# EAGLE board os30_master (EAGLE 7.7.0)
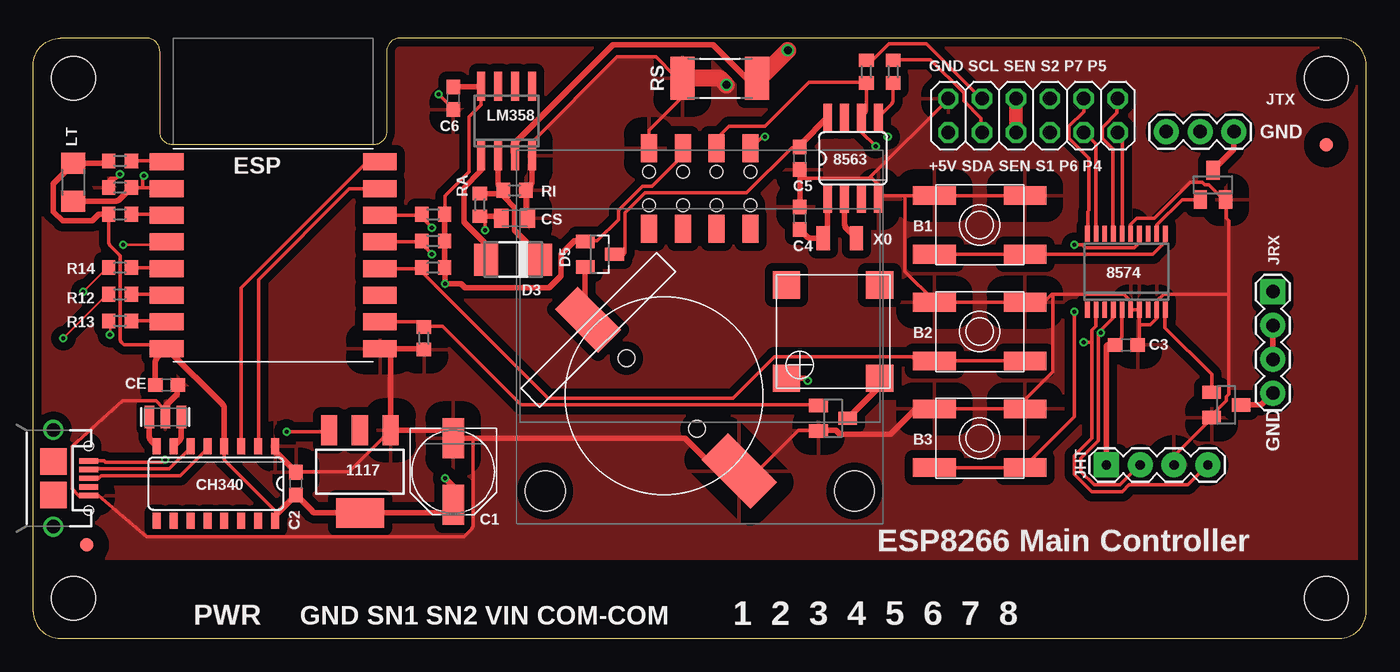
[diagram p0: board, top side]
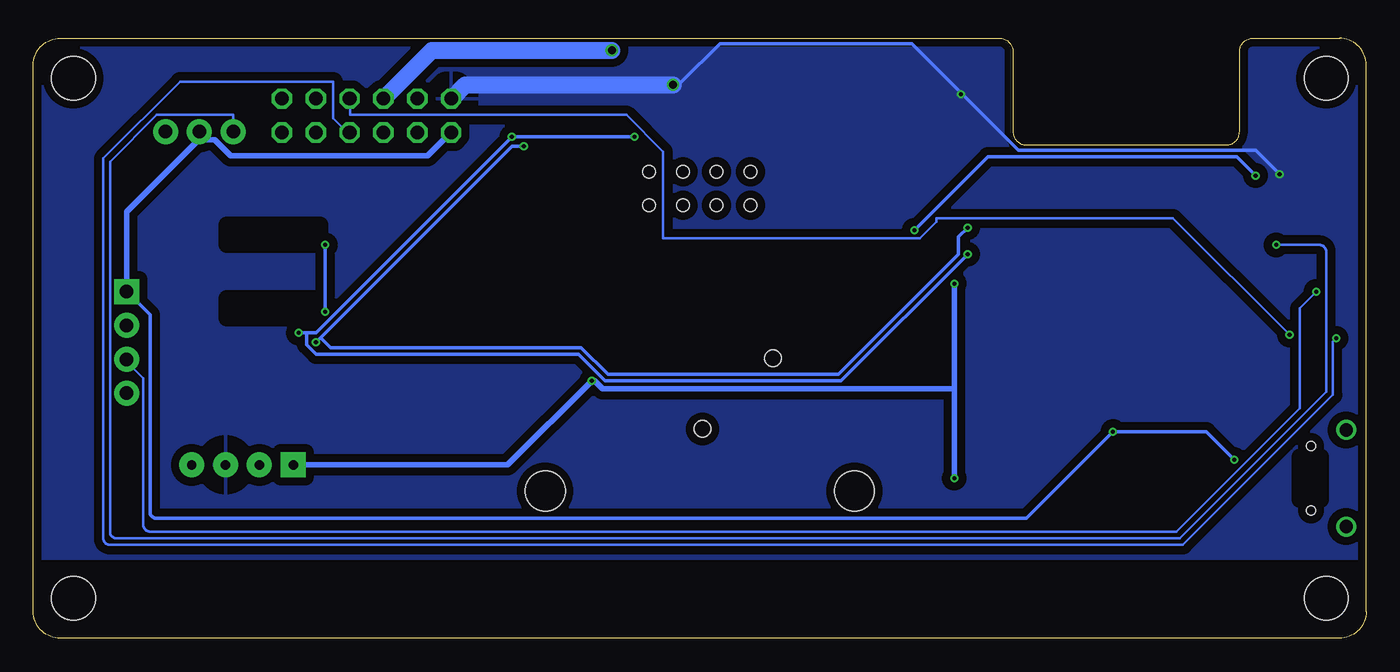
[diagram p1: board, bottom side, seen from below]

Size 100 x 45 mm. Coordinates in mm from the lower left corner, seen from the top.
Outline: 2,0 98,0 arc90 100,2 100,43 arc90 98,45 27.5,45 arc90 26.5,44 26.5,38 arc-90 25.5,37 10.5,37 arc-90 9.5,38 9.5,44 arc90 8.5,45 2,45 arc90 0,43 0,2 arc90 2,0
Copper layers (1*16): Top 0.035mm / dielectric 1.5mm / Bottom 0.035mm
Design rules "Fusion_eagle_rule_v1.1 *": minimum track width 6mil, minimum drill 12mil, track to track 6mil, track to pad 6mil, pad to pad 6mil, via to via 6mil, smd to smd 0mil, copper to edge 10mil, drill to drill 10mil, minimum pad ring 10mil, minimum via ring 6mil, stop-mask expansion 2mil, vias tented up to drill 100mil, thermal gap 50mil
Net classes: 0 default: width 0.203 mm, clearance 0.178 mm; 1 power: width 0.254 mm, clearance 0.203 mm; 2 relaypower: width 0.813 mm, clearance 0.305 mm
Holes 3.3 mm at 3,3 97,3 3,42 97,42
bRestrict: area 78.5,29.5 to 85.5,31; area 78.5,24 to 85.5,25.5; area 3.4,10.4 to 5,13.6
vRestrict: area 11,20.5 to 25,36.5

## Footprints (pad centres in the part's own frame; a part is rotated, then mirrored left to right if it is on the bottom)
SOT223 = smd 1.219 x 2.235: 1 -2.311,-3.099; 2 0,-3.099; 3 2.311,-3.099 | smd 3.6 x 2.2: 4 0,3.099
SO08 = smd 0.66 x 2.032: 1 -1.905,-3.073; 2 -0.635,-3.073; 3 0.635,-3.073; 4 1.905,-3.073; 5 1.905,3.073; 6 0.635,3.073; 7 -0.635,3.073; 8 -1.905,3.073
SSOP20 = smd 0.35 x 1.2: 1 -2.925,-2.85; 2 -2.275,-2.85; 3 -1.625,-2.85; 4 -0.975,-2.85; 5 -0.325,-2.85; 6 0.325,-2.85; 7 0.975,-2.85; 8 1.625,-2.85; 9 2.275,-2.85; 10 2.925,-2.85; 11 2.925,2.85; 12 2.275,2.85; 13 1.625,2.85; 14 0.975,2.85; 15 0.325,2.85; 16 -0.325,2.85; 17 -0.975,2.85; 18 -1.625,2.85; 19 -2.275,2.85; 20 -2.925,2.85
EVQ-Q2 = smd 3.2 x 1.4: A -3.4,-2.2; A' 3.4,-2.2; B -3.4,2.2; B' 3.4,2.2
BATTCON_12MM_SMT = smd 2.8 x 5.2: P$1 0,11.96 | smd 2.4 x 4.6: P$2 0,-4.1 | hole 1.25: 0,7.5; 0,0
SMT-8585-BUZZER = smd 2.05 x 2.05: + -3.5,-3.5; - 3.5,-3.5; A- 3.5,3.5; NC1 -3.5,3.5
PANASONIC_D = smd 3 x 1.6: + 2.5,0; - -2.5,0
C0603 = smd 1.1 x 1: 1 -0.85,0; 2 0.85,0
SO16 = smd 0.6 x 1.2: 1 -4.445,-2.8; 2 -3.175,-2.8; 3 -1.905,-2.8; 4 -0.635,-2.8; 5 0.635,-2.8; 6 1.905,-2.8; 7 3.175,-2.8; 8 4.445,-2.8; 9 4.445,2.8; 10 3.175,2.8; 11 1.905,2.8; 12 0.635,2.8; 13 -0.635,2.8; 14 -1.905,2.8; 15 -3.175,2.8; 16 -4.445,2.8
C0805K = smd 1.1 x 1.4: 1 -1,0; 2 1,0
DO-214AC = smd 1.8 x 2.4: A 2.025,0; C -2.025,0
SOT23 = smd 1 x 1.4: 1 -0.95,-1.1; 2 0.95,-1.1; 3 0,1.1
ESP12_WES = smd 2.54 x 1.27: 0 8,-3.27; 2 8,-5.27; 4 8,0.73; 5 8,-1.27; 12 -8,-5.27; 13 -8,-7.27; 14 -8,-3.27; 15 8,-7.27; 16 -8,-1.27; ADC -8,2.73; EN -8,0.73; GND 8,-9.27; RST -8,4.73; RX 8,2.73; TX 8,4.73; VCC -8,-9.27
1X04-NARROW = drill 0.7 pad 1.88 square: 1 0,0 | drill 0.7 pad 1.88: 2 2.54,0; 3 5.08,0; 4 7.62,0
2X06 = drill 1.016 octagon: 1 -6.35,-1.27; 2 -6.35,1.27; 3 -3.81,-1.27; 4 -3.81,1.27; 5 -1.27,-1.27; 6 -1.27,1.27; 7 1.27,-1.27; 8 1.27,1.27; 9 3.81,-1.27; 10 3.81,1.27; 11 6.35,-1.27; 12 6.35,1.27
1X04 = drill 1.016 pad 1.88 square: 1 0,0 | drill 1.016 pad 1.88: 2 2.54,0; 3 5.08,0; 4 7.62,0
1X03 = drill 1.016 pad 1.88: 1 0,0; 2 2.54,0; 3 5.08,0
SSD1306_OLED_I2C_SMD3 = smd 1.2 x 2.1: 1 -3.81,1.75; 1' -3.81,-4.29; 2 -1.27,1.75; 2' -1.27,-4.29; 3 1.27,1.75; 3' 1.27,-4.29; 4 3.81,1.75; 4' 3.81,-4.29 | hole 3: 11.6,-23.95; -11.6,-23.95 | hole 0.95: -3.81,-2.53; -3.81,-0.01; -1.27,-2.53; -1.27,-0.01; 1.27,-2.53; 1.27,-0.01; 3.81,-2.53; 3.81,-0.01
SO08' = smd 0.6 x 2.2: 1 -1.905,-2.6; 2 -0.635,-2.6; 3 0.635,-2.6; 4 1.905,-2.6; 5 1.905,2.6; 6 0.635,2.6; 7 -0.635,2.6; 8 -1.905,2.6
R1206 = smd 1.6 x 1.803: 1 -1.422,0; 2 1.422,0
R0603 = smd 1 x 1.1: 1 -0.85,0; 2 0.85,0
R2512 = smd 1.8 x 3.2: 1 -2.8,0; 2 2.8,0
FIDUCIAL_1MM = smd 1 x 1: 1 0,0
USB-MICROB2 = smd 0.4 x 1.4: D+ 0,2.65; D- -0.65,2.65; GND 1.3,2.65; ID 0.65,2.65; VBUS -1.3,2.65 | drill 1: MT1 -3.625,0; MT2 3.625,0 | smd 2 x 2: MT3 1.25,0; MT4 -1.25,0 | hole 0.7: -2.425,2.65; 2.425,2.65
RESONATOR-SMD = smd 0.7 x 1.7: 1 -1.2,0; 2 0,0; 3 1.2,0
MM20SS1 = smd 1.8 x 1: 1 0,-1.25; 4 0,1.25

## Placement (x,y rotation side)
1117  [SOT223]  24.5,12.5 180 top
8563  PCF8563  [SO08]  61.5,36 0 top
8574  PCF8574TS  [SSOP20]  82,27.5 0 top
B1  SPST_TACT-EVQQ2  [EVQ-Q2]  71,31 0 top
B2  SPST_TACT-EVQQ2  [EVQ-Q2]  71,23 0 top
B3  SPST_TACT-EVQQ2  [EVQ-Q2]  71,15 0 top
BAT  CR1220  [BATTCON_12MM_SMT]  44.5,21 225 top
BUZ  BUZZER  [SMT-8585-BUZZER]  60,23 0 top
C1  100uF  [PANASONIC_D]  31.5,12.5 270 top
C2  0.1u  [C0603]  19.7,11.6 270 top
C3  0.1u  [C0603]  82,22 0 top
C4  0.1u  [C0603]  57.5,31.5 90 top
C5  0.1u  [C0603]  57.5,36 270 top
C6  0.1u  [C0603]  31.5,40.5 270 top
CE  0.1u  [C0603]  10,19 0 top
CH340  CH340G  [SO16]  13.7,11.6 180 top
CS  10u  [C0805K]  36.1,31.5 0 top
D3  M7  [DO-214AC]  36,28.4 180 top
D5  BAT54C  [SOT23]  42.5,28.8 270 top
ESP  ESP  [ESP12_WES]  18,31 0 top
JHT  [1X04-NARROW]  80.5,13 0 top
JP1  M04X2  [2X06]  75,39.2 0 top
JRX  [1X04]  93,26 270 top
JTX  [1X03]  85,38 0 top
LCD  SSD1306_OLED_I2CSMD3  [SSD1306_OLED_I2C_SMD3]  50,35 0 top
LM358  [SO08']  35.5,38.8 0 top
LT  100K  [R1206]  3,34.2 90 top
QB  AO3400  [SOT23]  60,16.5 270 top
QR  BSS123  [SOT23]  89.5,17.5 270 top
QT  BSS123  [SOT23]  88.5,34 0 top
R0  10k  [R0603]  30,27.8 0 top
R12  4.7k  [R0603]  6.5,25.8 180 top
R13  4.7k  [R0603]  6.5,23.8 180 top
R14  1K  [R0603]  6.5,27.8 0 top
R15  10K  [R0603]  29.3,22.5 90 top
RA  100  [R0603]  33.5,32.5 90 top
RC  4.7k  [R0603]  62.5,42.5 90 top
RCL  10K  [R0603]  30,31.8 0 top
RD  330  [R0603]  64.5,42.5 90 top
RDA  10K  [R0603]  30,29.8 0 top
REN  10k  [R0603]  6.5,31.8 180 top
RI  100K  [R0603]  36.1,33.6 180 top
RL  100K  [R0603]  6.5,33.8 180 top
RR  10k  [R0603]  6.5,35.8 180 top
RS  0.2  [R2512]  51.5,42 0 top
U$1  FIDUCIAL  [FIDUCIAL_1MM]  4,7 0 top
U$2  FIDUCIAL  [FIDUCIAL_1MM]  97,37 0 top
USB  USBMICROB2  [USB-MICROB2]  1.5,12 270 top
X  12MHz  [RESONATOR-SMD]  9.9,16.6 180 top
X0  32.768kHz  [MM20SS1]  60.5,30 270 top

## Library data of the parts
1117 JHT JRX JTX = SparkFun
8563 BUZ C2-C6 CE CS R0 REN RR = adafruit
8574 = micro-philips; MPN: PCF8574TS/3,118; OC_FARNELL: 1506644; OC_NEWARK: 70R6873
B1-B3 = adafruit_3
BAT CH340 USB X = SparkFunNew
C1 = resistor
D3 D5 = diode
ESP = JeeParts
JP1 = pinhead
LCD LT R15 RA RCL RDA RI RL RS = adafruit2013
LM358 = linear
QB QR QT = transistor-small-signal
R12-R14 RC RD U$1 U$2 = adafruitGood
X0 = crystal

## Nets
ADC: CS.1 ESP.ADC LT.1 RA.1 RL.1
D+: CH340.5 USB.D+
D-: CH340.6 USB.D-
EN: ESP.EN REN.1
ERX: CH340.2 ESP.RX
ETX: CH340.3 ESP.TX
GND [power]: 1117.1 8563.4 8574.6 8574.7 8574.9 8574.15 B1.B B1.B' B2.B B2.B' B3.B B3.B' BAT.P$1 C1.- C2.1 C3.2 C4.2 C5.2 C6.2 CE.2 CH340.1 CS.2 ESP.GND JHT.3 JP1.2 LCD.1 LM358.4 QB.2 QR.2 QT.2 R15.1 RI.1 RL.2 RS.1 USB.GND X.2
GPIO0: B2.A B2.A' ESP.0 R0.1
GPIO12: ESP.12 R12.1
GPIO13: ESP.13 R13.1
GPIO14: ESP.14 R14.2
GPIO15: ESP.15 QB.1 R15.2
GPIO16: ESP.16 JTX.1
N$1: 8563.1 C4.1 X0.1
N$2: BUZ.- QB.3
N$3: JP1.3 RD.2
N$4: JP1.4 RC.2
N$5: JP1.7 R12.2
N$6: JP1.8 R13.2
N$7: D3.C LM358.2 RA.2 RI.2
N$17: 8563.8 C5.1 D5.3
N$24: CH340.7 X.1
N$26: JRX.2 JRX.3 R14.1
N$28: JTX.3 QT.3
N$29: JRX.4 QR.3
N$30: 8563.2 X0.4
N$36: BAT.P$2 D5.2
N$40: CH340.8 X.3
N$43: D3.A LM358.1
P0: 8574.10 QR.1
P1: 8574.11 B1.A B1.A'
P2: 8574.12 QT.1
P3: 8574.14 B3.A B3.A'
P4: 8574.16 JP1.11
P5: 8574.17 JP1.12
P6: 8574.19 JP1.9
P7: 8574.20 JP1.10
RST: ESP.RST RR.1
SCL: 8563.6 8574.2 ESP.4 JHT.4 LCD.3 RC.1 RCL.1
SDA: 8563.5 8574.4 ESP.5 JHT.2 LCD.4 RD.1 RDA.1
SENSE [relaypower]: JP1.5 JP1.6 LM358.3 RS.2
VBAT: 8563.3
VCC: 1117.4 8574.5 BUZ.+ C1.+ C2.2 C3.1 C6.1 CE.1 CH340.4 CH340.16 D5.1 ESP.VCC JHT.1 LCD.2 LM358.8 LT.2 R0.2 RCL.2 RDA.2 REN.2 RR.2
VIN [power]: 1117.3 JP1.1 JRX.1 JTX.2 USB.VBUS

## Tracks (layer width: path | path; a pad name or v marks a point on that pad's centre or on a via)
ADC  (via drill 0.3 pad 0.25)
  Top 0.254: RL.1 8.2,33.8 | 8.2,33.8 9.83,33.8 arc-45 ESP.ADC | 8.2,33.8 8.2,34.7 v8.3,34.7 | v33.9,30.6 33.9,31.5 RA.1
  Top 0.406: LT.1 6.12,32.78 arc45 6.47,32.92 RL.1 | RA.1 34.74,31.65 arc-45 CS.1
  Bottom 0.254: v8.3,34.7 9.7,36.1 28.4,36.1 v33.9,30.6
D+
  Top 0.254: USB.D+ 4.9,12 5.1,12.2 11,12.2 13.1,14.3 13.1,14.4 CH340.5
D-
  Top 0.254: CH340.6 11.8,14.3 10.2,12.7 4.2,12.7 USB.D-
EN
  Top 0.254: REN.1 9.83,31.8 arc-45 ESP.EN
ERX
  Top 0.254: CH340.2 16.9,14.4 16.9,26.9 23.7,33.7 26,33.7 ESP.RX
ETX
  Top 0.254: CH340.3 15.6,26.3 25,35.7 26,35.7 ESP.TX
GND  (via drill 0.3 pad 0.25, 0.6 pad 0.25)
  Top 0.254: v6.5,34.8 6.2,34.5 5.8,34.5 5.7,34.4 5.7,33.8 RL.2 | LM358.4 37.4,36.4 37.4,37.2 43.8,43.6 46.7,43.6 48.1,42.2 RS.1 48.7,40.6 46.2,38.1 46.2,36.8 LCD.1 | v30.4,40.8 31.1,40.1 31.4,40.1 31.5,40 C6.2 | 1117.1 26.7,15.5 23.7,12.5 19.9,12.5 C2.1 | X.2 9.7,17.3 9.2,17.8 6.7,17.8 2.9,14.4 2.9,11.2 3.4,10.7 USB.GND 4.9,10.7 8.5,7.6 32.3,7.6 32.9,8.2 32.9,8.3 33,8.4 33,15 | QB.2 58.9,15.6 57.4,15.6 53.7,11.9 53.1,12.5 BAT.P$1 | JHT.3 85.6,13 85.6,13.7 88.4,16.5 QR.2 88.5,16.6 88.5,16.8 89.5,17.8 89.5,18.1 89.7,18.3 89.7,25.8 | 89.7,25.8 89.7,31.3 89.5,31.5 89.5,32.9 QT.2 89.4,33 89.2,33 88.2,34 87.9,34 87.7,34.2 86.8,34.2 84.1,31.5 82.8,31.5 82.3,31 82.3,30.4 8574.15 | B1.B' B1.B 65.4,33.2 | B3.B B3.B' 74.5,17.25 74.5,18 76.5,20 76.5,25.75 76.4,25.8 | 65.4,33.2 63.5,33.2 63.4,33.1 63.4,33 8563.4 63.4,33.2 63.4,34 62.9,34.5 62.8,34.5 | 62.8,34.5 57.5,34.5 | 65.4,33.2 65.4,27.5 67.6,25.3 B2.B B2.B' 75.8,25.2 76.4,25.8 | 82.97,23.5 8574.7 8574.6 82.3,24.7 82.3,25.3 81.8,25.8 76.4,25.8 | 82.97,23.5 82.97,22.3 arc-45 C3.2 | 82.97,23.5 83.8,23.5 84.3,24 84.3,24.6 8574.9 84.3,24.7 84.3,25.3 84.8,25.8 89.7,25.8 | JP1.2 68.6,40.4 62.8,34.6 62.8,34.5
  Top 0.406: CH340.1 18.14,14.21 arc45 18.29,13.86 C2.1 | X.2 9.9,17.19 arc-45 10.05,17.55 10.8,18.3 10.8,18.88 arc-45 CE.2 | R15.1 arc45 29.11,21.73 ESP.GND 26.8,21.6 26.8,15.8 1117.1 31.5,15.6 C1.- 33,15 48.9,15 50.5,13.4 52,13.4 52.9,12.5 BAT.P$1 | C5.2 57.5,34.5 C4.2 | LM358.4 37.41,34.26 arc-45 37.26,33.91 RI.1 36.95,31.86 arc45 CS.2 | B3.B 66.2,17.2 64.3,15.3 60.5,15.3 60.2,15.6 59,15.6 QB.2
  Top 1.27: RS.1 51.5,42 v52,41.5
  Bottom 0.254: 30.35,40.85 26.1,36.6 8.3,36.6 v6.5,34.8 | 30.35,40.85 34.1,44.6 48.5,44.6 51.4,41.7 v52,41.5 | v30.4,40.8 30.35,40.85
  Bottom 1.27: v52,41.5 67.6,41.5 68.6,40.5 JP1.2
  pour Top (isolate 0.61): 0,45 99.5,45 arc-90 100,44.5 100,6 0.5,6 arc-90 0,6.5
  pour Bottom (isolate 0.61): 0,45 99.5,45 arc-90 100,44.5 100,6 0.5,6 arc-90 0,6.5
GPIO0
  Top 0.254: ESP.0 28.98,27.73 arc45 R0.1 29.2,27.7 29.2,27.4 38.6,18 52.5,18 55.6,21.1 65.9,21.1 66.2,20.8 B2.A B2.A'
GPIO12
  Top 0.254: R12.1 9.83,25.8 arc-45 ESP.12
GPIO13
  Top 0.254: R13.1 9.83,23.8 arc-45 ESP.13
GPIO14
  Top 0.254: R14.2 9.83,27.8 arc-45 ESP.14
GPIO15
  Top 0.254: ESP.15 28.71,23.73 arc-45 29.07,23.58 R15.2 29.4,23.4 30.7,23.4 36.6,17.5 58.9,17.5 QB.1
GPIO16  (via drill 0.3)
  Top 0.203: v6.75,29.5 10,29.5 ESP.16
  Bottom 0.203: v6.75,29.5 3.5,29.5 arc90 3,29 3,18.5 14,7.5 93.75,7.5 arc90 94.25,8 94.25,35.75 90.75,39.25 85,39.25 JTX.1
N$1
  Top 0.406: C4.1 58,30.15 arc45 58.36,30 X0.1 59.45,30.2 arc45 59.59,30.55 8563.1
N$2
  Top 0.406: BUZ.- 63.5,19.11 arc-45 63.35,18.75 QB.3
N$3
  Top 0.254: JP1.3 71.1,38 71.1,39 69.8,40.3 69.8,40.9 67.3,43.4 64.5,43.4 RD.2
N$4
  Top 0.254: JP1.4 71.1,40.5 67,44.6 64.2,44.6 63,43.4 62.5,43.4 RC.2
N$5  (via drill 0.3)
  Top 0.203: v2.25,22.5 5.5,25.75 R12.2
  Bottom 0.203: v2.25,22.5 2.5,22.25 2.5,18.25 13.75,7 94.25,7 arc90 94.75,7.5 94.75,36 89,41.75 77.5,41.75 77.5,39 76.5,38 JP1.7
N$6  (via drill 0.3)
  Top 0.203: v5.75,22.75 5.75,23.75 R13.2
  Bottom 0.203: v5.75,22.75 14.5,31.5 32.25,31.5 32.25,31.25 33.5,30 52.75,30 52.75,36.5 55.5,39.25 76.25,39.25 76.25,40.25 JP1.8
N$7
  Top 0.406: LM358.2 34.87,34.19 arc45 35.01,33.84 RI.2 | RA.2 34.79,33.35 arc45 35.15,33.5 RI.2 | RI.2 35.2,33.3 35.3,33.2 35.3,33.1 36.1,32.3 36.1,30.6 37.5,29.2 37.9,29.2 38,29.1 38,28.4 D3.C
N$17
  Top 0.254: D5.3 44.3,28.8 44.4,28.9 44.4,31.9 45.9,33.4 53.5,33.4 56.9,36.8 57.3,36.8 C5.1
  Top 0.406: C5.1 arc-45 57.59,37.07 8563.8
N$24
  Top 0.406: X.1 11.1,15.18 arc-45 10.95,14.83 CH340.7
N$26  (via drill 0.3)
  Top 0.203: v3.75,26 5.5,27.75 R14.1
  Top 0.406: JRX.2 JRX.3
  Bottom 0.203: v3.75,26 5,24.75 5,17.25 14.25,8 91.25,8 arc90 91.75,8.5 91.75,19.5 93,20.75 JRX.3
N$28
  Top 0.406: JTX.3 90.08,36.89 arc-45 89.93,36.53 QT.3
N$29
  Top 0.406: QR.3 91.91,17.5 arc45 92.27,17.65 JRX.4
N$30
  Top 0.406: 8563.2 60.87,31.09 arc45 61.01,30.74 X0.4
N$36
  Top 0.406: D5.2 41.4,24.31 arc45 41.55,23.95 BAT.P$2
N$40
  Top 0.406: X.3 8.7,15.16 arc45 8.85,14.81 CH340.8
N$43
  Top 0.406: D3.A 34,28.4 34,29.5 32.3,31.2 32.3,33.8 33.6,35.1 LM358.1
P0
  Top 0.254: QR.1 88.4,19.8 84.9,23.3 84.9,24.6 8574.10
P1
  Top 0.254: B1.A B1.A' 84,28.8 84.9,29.7 84.9,30.3 8574.11
P2
  Top 0.254: QT.1 86.2,32.9 84.3,31 84.3,30.4 8574.12
P3  (via drill 0.3 pad 0.25)
  Top 0.254: B3.A B3.A' 74.4,12.9 78.1,16.6 v78.1,24.5 | v78.1,29.5 78.7,29.5 78.9,29.3 82.6,29.3 83,29.7 83,30.3 8574.14
  Bottom 0.254: v78.1,24.5 v78.1,29.5
P4
  Top 0.254: 8574.16 81.7,30.4 81.7,37.6 81.4,37.9 JP1.11
P5
  Top 0.254: 8574.17 81,30.4 81,36.7 80.2,37.5 80.2,38.3 81.3,39.4 81.3,40.4 JP1.12
P6
  Top 0.254: 8574.19 79.7,30.4 79.7,37.1 78.9,37.9 JP1.9
P7
  Top 0.254: JP1.10 78.8,40.4 78.8,39.5 77.7,38.4 77.7,37.5 79.2,36 79.2,32.1 79.1,32 79.1,30.4 8574.20
RST
  Top 0.254: RR.1 9.83,35.8 arc-45 ESP.RST
SCL  (via drill 0.3 pad 0.25)
  Top 0.254: ESP.4 28.98,31.73 arc45 RCL.1 29.2,31.7 29.2,31.5 v29.9,30.8 | JHT.4 88.1,13 86.6,11.5 82.2,11.5 81.7,11 79.4,11 78.1,12.3 78.1,13.7 79.4,15 79.4,22.2 | 79.4,22.2 79.4,23.1 79.7,23.4 79.7,24.6 8574.2 | v78.8,22.2 79.4,22.2 | v63.2,36.9 62.1,38 62.1,39 8563.6 62.35,39.29 arc45 62.5,39.65 RC.1 62.4,41.7 58.2,41.7 54.9,38.4 52.2,38.4 51.3,37.5 51.3,36.8 LCD.3
  Bottom 0.254: 78.45,22.55 64.1,36.9 v63.2,36.9 | 78.45,22.55 v78.8,22.2 | v29.9,30.8 30.6,30.1 30.6,28.8 39.6,19.8 56.9,19.8 58.9,21.8 77.7,21.8 78.45,22.55
SDA  (via drill 0.3 pad 0.25)
  Top 0.254: ESP.5 28.98,29.73 arc45 RDA.1 29.2,29.7 29.2,29.5 v29.9,28.8 | RD.1 64.5,40.38 arc-45 64.35,40.02 8563.5 63.4,39 63.4,38.3 v64.1,37.6 | JHT.2 83,13 81.5,11.5 79.6,11.5 78.6,12.5 78.6,13.5 79.9,14.8 79.9,22.9 | 79.9,22.9 81,24 81,24.6 8574.4 | v80.1,22.9 79.9,22.9 | v54.9,37.6 54.7,37.6 53.9,36.8 LCD.4
  Bottom 0.254: 79.5,22.9 78.8,22.9 v64.1,37.6 v54.9,37.6 | 79.5,22.9 v80.1,22.9 | v29.9,28.8 39.4,19.3 57.1,19.3 59.1,21.3 78.8,21.3 79.5,22 79.5,22.9
SENSE  (via drill 0.6 pad 0.25)
  Top 0.406: LM358.3 36,36.5 36,37 43.5,44.5 51,44.5 53.5,42 RS.2
  Top 1.016: JP1.5 73.7,38 73.7,40.4 JP1.6
  Top 1.27: v56.6,44.1 54.5,42 RS.2
  Bottom 1.27: v56.6,44.1 70.1,44.1 JP1.6
VCC  (via drill 0.3 pad 0.25)
  Top 0.254: REN.2 5.65,29.76 arc45 5.8,29.4 6.5,28.7 6.5,22.51 arc45 6.65,22.15 6.8,22 9.52,22 arc-45 9.88,21.85 ESP.VCC | RCL.2 30.9,32 30.9,33.2 32.7,35 32.7,39.1 33.6,40 33.6,41.2 LM358.8 | 18.32,9.38 14.3,13.4 14.3,14.2 CH340.4 | 8574.5 81.67,22.73 arc-45 81.53,22.38 C3.1 | LCD.2 48.7,36.7 48.7,36.2 46.4,33.9 45.7,33.9 43.9,32.1 43.9,31.4 42.3,29.8 41.6,29.8 D5.1
  Top 0.406: CH340.16 18.14,8.99 arc-45 18.29,9.34 18.32,9.38 C2.2 20.9,9.55 arc45 21.26,9.4 1117.4 31.5,9.4 C1.+ 31.5,11.4 v30.9,12 | CE.1 9.15,20.67 arc-45 9.3,21.03 ESP.VCC 14.19,17.54 arc-45 14.34,17.19 CH340.4 | RCL.2 RDA.2 R0.2 30.9,27.6 v30.9,26.6 32.1,26.6 32.4,26.3 38.7,26.3 39.6,27.2 39.6,28.8 40.6,29.8 41.2,29.8 D5.1 | C6.1 33.47,41.35 arc45 LM358.8 | RR.2 5.62,35.77 arc-45 5.26,35.62 LT.2 2.9,35.5 1.5,34.1 1.5,32 2.2,31.3 4.4,31.3 4.9,31.8 REN.2 | JHT.1 80.5,21.9 80.6,22 C3.1 | v58.1,19.3 57.9,19.5 BUZ.+
  Bottom 0.406: JHT.1 64.4,13 v58.1,19.3 57.9,19.3 57.3,18.7 30.9,18.7 | v30.9,12 30.9,18.7 | 30.9,18.7 v30.9,26.6
VIN  (via drill 0.3 pad 0.25)
  Top 0.254: v19,15.5 22.1,15.5 1117.3 | v9.9,13.4 9.9,13.3 9.8,13.2 5.4,13.2 5.3,13.3 USB.VBUS
  Bottom 0.254: v9.9,13.4 12,15.5 v19,15.5 25.5,9 90.75,9 arc90 91.25,9.5 91.25,24.25 JRX.1
  Bottom 0.406: JRX.1 93,32 87.6,37.4 87.6,38 JTX.2 87.4,37.4 86.4,37.4 85.2,36.2 70.4,36.2 68.7,37.9 JP1.1

## Text on the board
tNames: GND SCL SEN S2 P7 P5 | GND | +5V SDA SEN S1 P6 P4 | GND | ESP8266 Main Controller | PWR | GND SN1 SN2 VIN COM-COM | 1 2 3 4 5 6 7 8